# EAGLE board LIC_rack_ZR-0A (EAGLE 7.2.0)
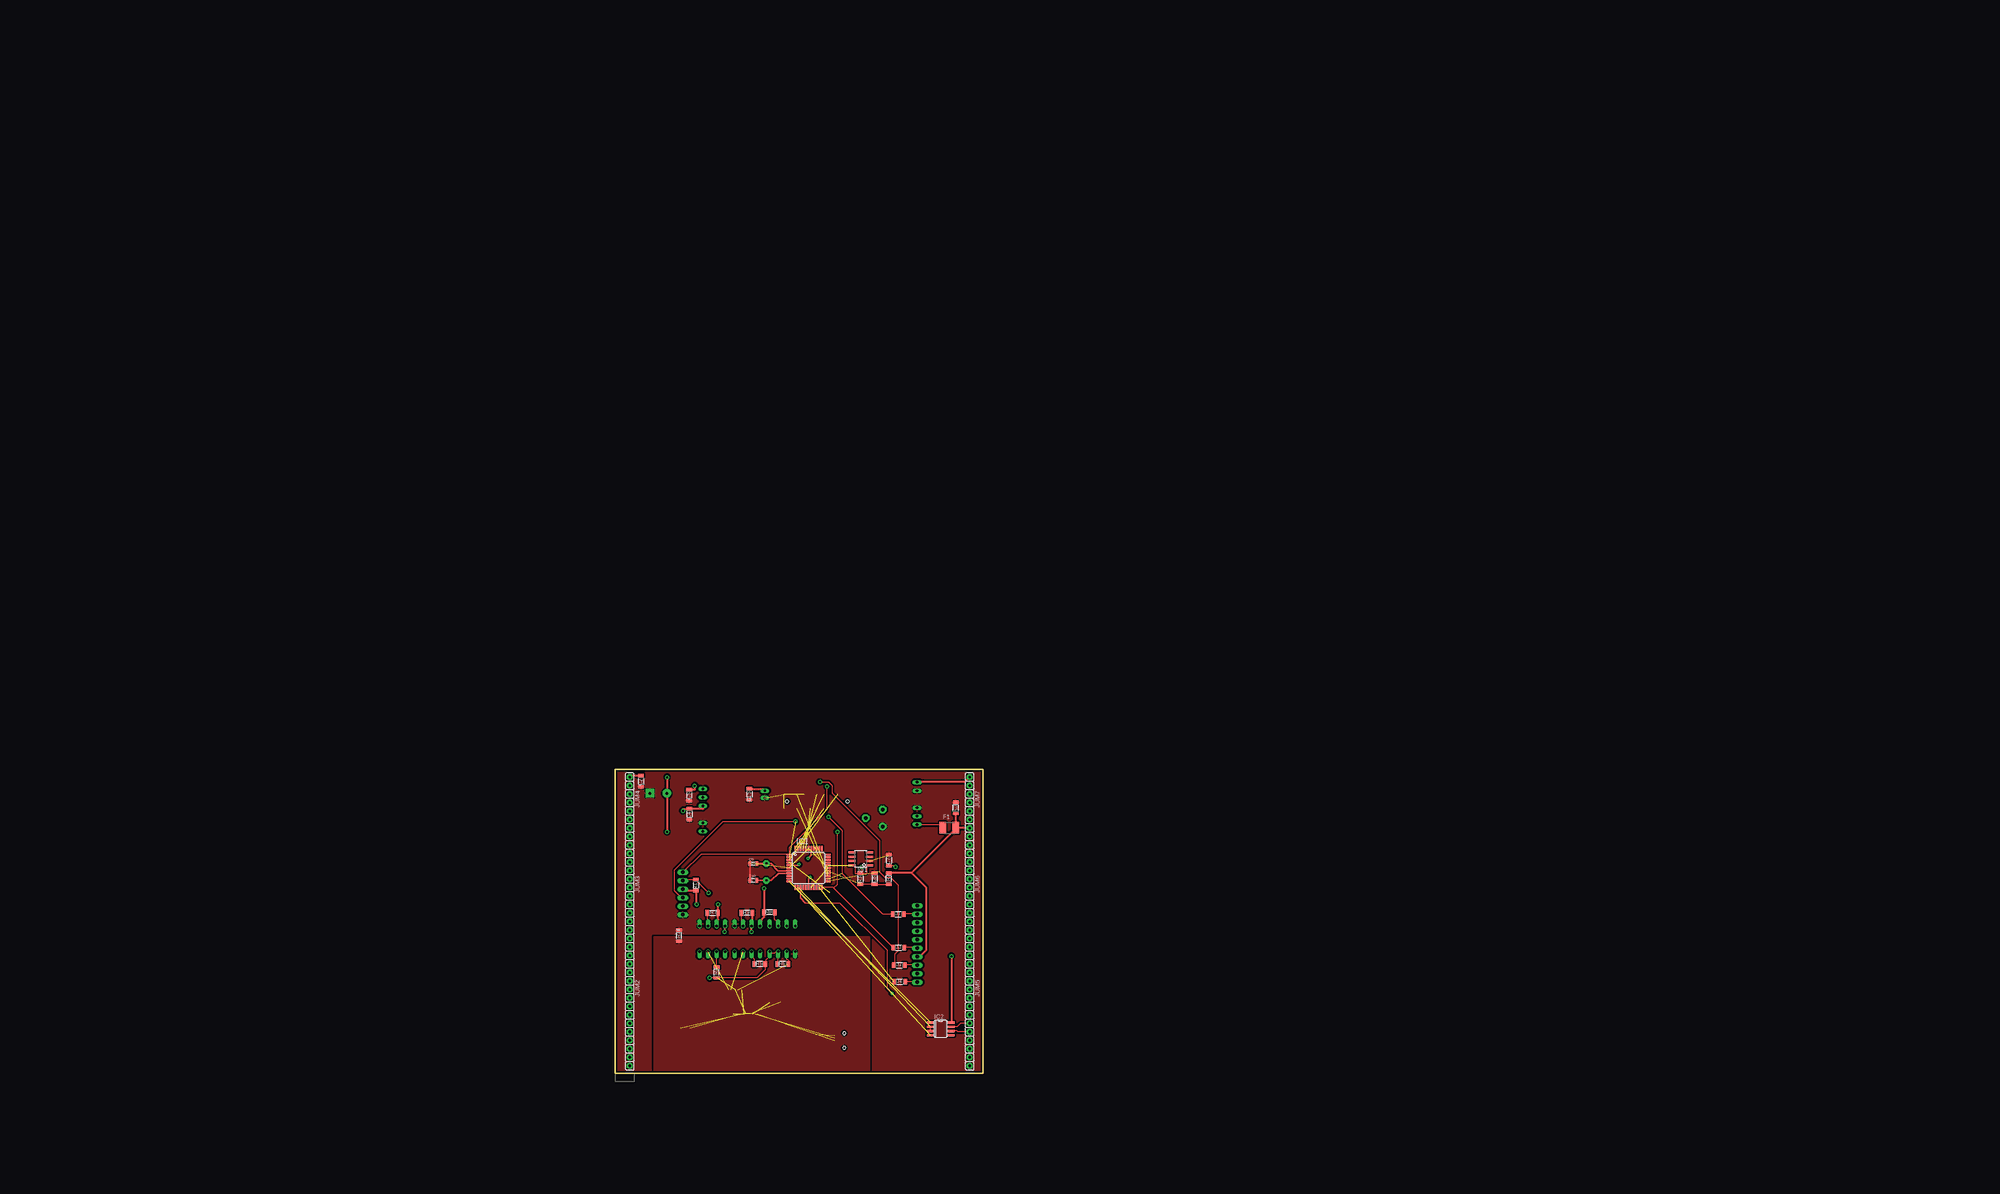
[diagram p0: board, top side]
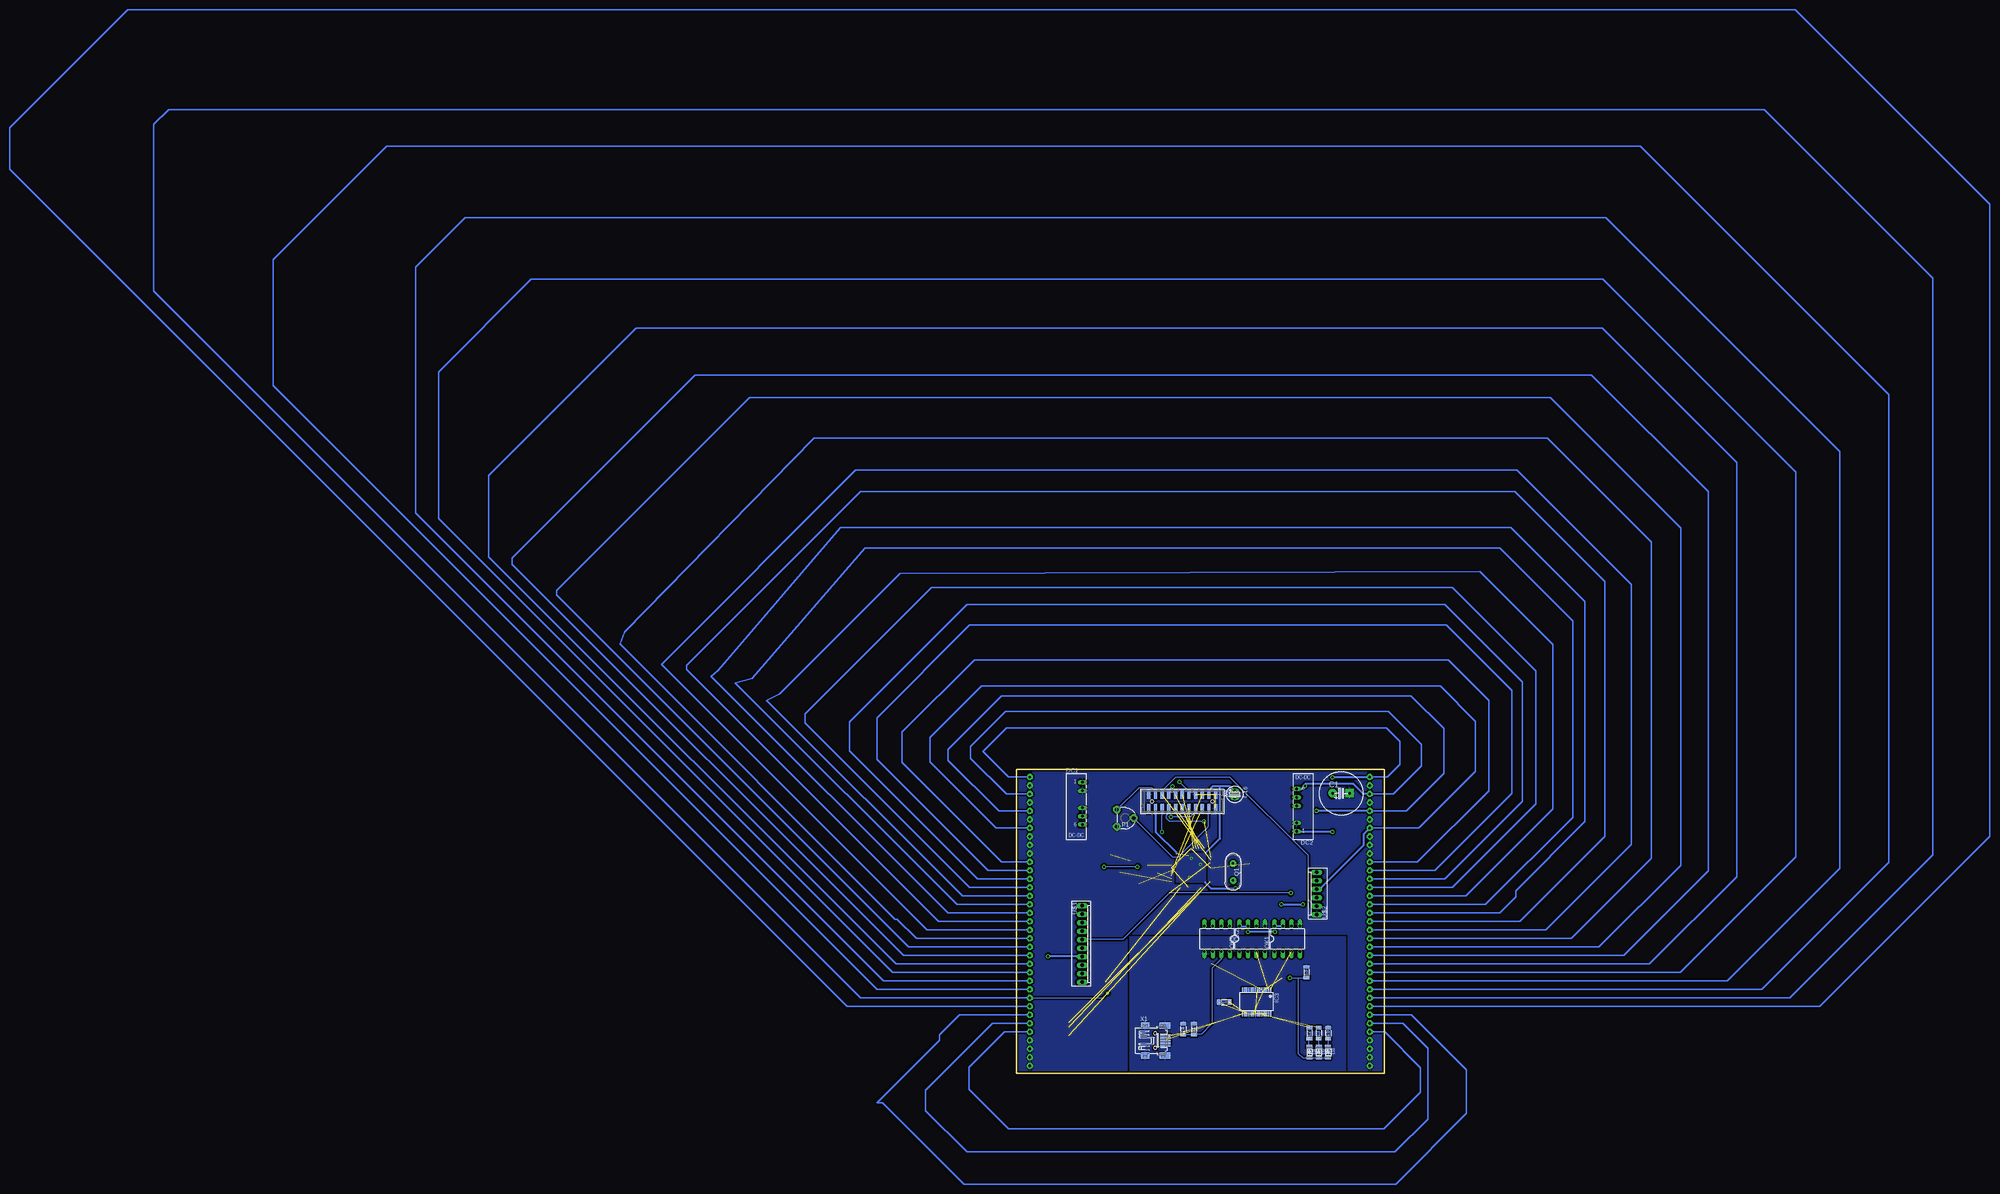
[diagram p1: board, bottom side, seen from below]

Size 110 x 90.8 mm. Coordinates in mm from the lower left corner, seen from the top.
Outline: 0,0 110,0 110,90.8 0,90.8 0,0
Copper layers (1*16): Top 0.04mm / dielectric 1.5mm / Bottom 0.04mm
Design rules "mucha_navrh *": minimum track width 0.2mm, minimum drill 0.6mm, track to track 0.5mm, track to pad 0.5mm, pad to pad 0.3mm, via to via 0.3mm, smd to smd 0mil, copper to edge 0.5mm, drill to drill 0.5mm, minimum pad ring 0.3mm, minimum via ring 0.3mm, stop-mask expansion 0.1mm, vias tented up to drill 0.8mm, thermal gap 0.3mm
Net classes: 0 default: width 0.305 mm, drill 0.3 mm, clearance 0.2 mm; 1 PC: width 0.305 mm, drill 0.3 mm, clearance 0.2 mm to class 0; 2 Supply: width 0.61 mm, drill 0.3 mm, clearance 0.4 mm to class 0; 3 Ground: width 0.305 mm, drill 0.3 mm, clearance 0.2 mm to class 0

## Footprints (pad centres in the part's own frame; a part is rotated, then mirrored left to right if it is on the bottom)
C_EL_5+ = drill 0.813 pad 2.54: C+ -2.54,0 | drill 0.813 pad 2.54 square: C- 2.54,0
1206 = smd 1.143 x 1.702: 1 -1.587,0; 2 1.587,0
0805 = smd 1.016 x 1.422: 1 -0.953,0; 2 0.953,0
C_EL_2 = drill 0.813 pad 1.27 long: C+ 0,0; C- 2.223,0
P1206 = smd 0.914 x 1.778: A -1.905,0; K 1.587,0
NMA = drill 0.813 long: 1 0,6.35; 2 0,3.81; 4 0,-1.27; 5 0,-3.81; 6 0,-6.35
R1812 = smd 1.9 x 3.4: 1 -1.95,0; 2 1.95,0
TQFP44 = smd 1.5 x 0.5: 1 -5.8,4; 2 -5.8,3.2; 3 -5.8,2.4; 4 -5.8,1.6; 5 -5.8,0.8; 6 -5.8,0; 7 -5.8,-0.8; 8 -5.8,-1.6; 9 -5.8,-2.4; 10 -5.8,-3.2; 11 -5.8,-4; 23 5.8,-4; 24 5.8,-3.2; 25 5.8,-2.4; 26 5.8,-1.6; 27 5.8,-0.8; 28 5.8,0; 29 5.8,0.8; 30 5.8,1.6; 31 5.8,2.4; 32 5.8,3.2; 33 5.8,4 | smd 0.5 x 1.5: 12 -4,-5.8; 13 -3.2,-5.8; 14 -2.4,-5.8; 15 -1.6,-5.8; 16 -0.8,-5.8; 17 0,-5.8; 18 0.8,-5.8; 19 1.6,-5.8; 20 2.4,-5.8; 21 3.2,-5.8; 22 4,-5.8; 34 4,5.8; 35 3.2,5.8; 36 2.4,5.8; 37 1.6,5.8; 38 0.8,5.8; 39 0,5.8; 40 -0.8,5.8; 41 -1.6,5.8; 42 -2.4,5.8; 43 -3.2,5.8; 44 -4,5.8
SO08 = smd 0.66 x 2.032: 1 -1.905,-3.073; 2 -0.635,-3.073; 3 0.635,-3.073; 4 1.905,-3.073; 5 1.905,3.073; 6 0.635,3.073; 7 -0.635,3.073; 8 -1.905,3.073
SSOP28 = smd 0.4 x 1.5: 1 -4.225,-3.625; 2 -3.575,-3.625; 3 -2.925,-3.625; 4 -2.275,-3.625; 5 -1.625,-3.625; 6 -0.975,-3.625; 7 -0.325,-3.625; 8 0.325,-3.625; 9 0.975,-3.625; 10 1.625,-3.625; 11 2.275,-3.625; 12 2.925,-3.625; 13 3.575,-3.625; 14 4.225,-3.625; 15 4.225,3.625; 16 3.575,3.625; 17 2.925,3.625; 18 2.275,3.625; 19 1.625,3.625; 20 0.975,3.625; 21 0.325,3.625; 22 -0.325,3.625; 23 -0.975,3.625; 24 -1.625,3.625; 25 -2.275,3.625; 26 -2.925,3.625; 27 -3.575,3.625; 28 -4.225,3.625
SO08' = smd 0.61 x 2.21: 1 -1.905,-2.616; 2 -0.635,-2.616; 3 0.635,-2.616; 4 1.905,-2.616; 5 1.905,2.616; 6 0.635,2.616; 7 -0.635,2.616; 8 -1.905,2.616
S1G15_JU = drill 0.813 pad 1.778 octagon: 1 -17.78,0; 2 -15.24,0; 3 -12.7,0; 4 -10.16,0; 5 -7.62,0; 6 -5.08,0; 7 -2.54,0; 8 0,0; 9 2.54,0; 10 5.08,0; 11 7.62,0; 12 10.16,0; 13 12.7,0; 14 15.24,0; 15 17.78,0
S1G10_JU = drill 0.813 pad 1.778 octagon: 1 -11.43,0; 2 -8.89,0; 3 -6.35,0; 4 -3.81,0; 5 -1.27,0; 6 1.27,0; 7 3.81,0; 8 6.35,0; 9 8.89,0; 10 11.43,0
DIL08 = drill 0.813 offset: 1 -3.81,-3.81; 2 -1.27,-3.81; 3 1.27,-3.81; 4 3.81,-3.81; 5 3.81,3.81; 6 1.27,3.81; 7 -1.27,3.81; 8 -3.81,3.81
PT6V = drill 1.016 pad 2.184 octagon: 1 -2.54,-2.54; 2 2.54,-2.54; 3 0,2.54
HC-49U = drill 0.61 pad 1.93 octagon: 1 -2.54,0; 2 2.54,0
PSH02-10P = drill 1.016 pad 1.422 long: 1 -11.43,0; 2 -8.89,0; 3 -6.35,0; 4 -3.81,0; 5 -1.27,0; 6 1.27,0; 7 3.81,0; 8 6.35,0; 9 8.89,0; 10 11.43,0
PSH02-06P = drill 1.016 pad 1.422 long: 1 -6.35,0; 2 -3.81,0; 3 -1.27,0; 4 1.27,0; 5 3.81,0; 6 6.35,0
32005-201 = smd 3.1 x 0.5: 1 3,1.6; 2 3,0.8; 3 3,0; 4 3,-0.8; 5 3,-1.6 | smd 2.5 x 2: M1 -3,-4.45; M2 -3,4.45 | smd 3.3 x 2: M3 2.9,4.45; M4 2.9,-4.45 | hole 0.9: 0,2.2; 0,-2.2
87832-22 = smd 1 x 2.75: 1 -10,-2.15; 2 -10,2.15; 3 -8,-2.15; 4 -8,2.15; 5 -6,-2.15; 6 -6,2.15; 7 -4,-2.15; 8 -4,2.15; 9 -2,-2.15; 10 -2,2.15; 11 0,-2.15; 12 0,2.15; 13 2,-2.15; 14 2,2.15; 15 4,-2.15; 16 4,2.15; 17 6,-2.15; 18 6,2.15; 19 8,-2.15; 20 8,2.15; 21 10,-2.15; 22 10,2.15 | hole 1: -9,0; 9,0

## Placement (x,y rotation side)
C1  1000M/35V  [C_EL_5+]  12.9,83.7 0 bottom
C2  100n  [1206]  7.7,87.3 270 top
C3  100n  [1206]  101.8,79.4 90 top
C4  100n  [1206]  22.2,77.5 270 top
C5  100n  [1206]  22.1,83.1 270 top
C7  100nF  [1206]  81.8,63.7 270 top
C8  10uF/16V  [1206]  77.5,58.2 270 top
C9  22pF  [0805]  41.3,62.7 0 top
C10  22pF  [0805]  41.3,57.7 0 top
C11  10n  [1206]  56.9,13.2 270 bottom
C12  100n  [1206]  47.9,21.3 0 bottom
C13  100n  [1206]  23.3,30.2 270 bottom
C14  10u/16V  [1206]  60.1,13.2 270 bottom
C15  100nF  [1206]  40.1,83.4 270 top
C16  100M/10V  [C_EL_2]  44.7,84.5 270 bottom
D1  [P1206]  22.4,6.5 90 bottom
D2  [P1206]  19.6,6.5 90 bottom
D3  [P1206]  16.8,6.5 90 bottom
DC1  TMH2405S  [NMA]  90.2,80.7 0 bottom
DC2  TMH2412D  [NMA]  26.2,78.7 180 bottom
F1  PPTC1812SMD050  [R1812]  99.9,73.4 0 top
IC1  ATMEGA644A  [TQFP44]  57.8,61.4 0 top
IC2  MAX481CSA  [SO08]  97.3,13.3 270 top
IC3  FT232RL  [SSOP28]  38.2,21.4 180 bottom
IO1  TL431SO08  [SO08']  73.4,64.1 90 top
J1  J_1206  [1206]  84.6,47.6 0 top
J2  J_1206  [1206]  84.9,32.4 0 top
J3  J_1206  [1206]  84.7,37.6 0 top
J4  J_1206  [1206]  85,27.4 0 top
JUM2  S1G15_JUMP  [S1G15_JU]  4.34,20 270 top
JUM3  S1G10_JUMP  [S1G10_JU]  4.34,51.75 270 top
JUM4  S1G10_JUMP  [S1G10_JU]  4.34,77.15 270 top
JUM5  S1G15_JUMP  [S1G15_JU]  105.97,20 270 top
JUM6  S1G10_JUMP  [S1G10_JU]  105.97,51.75 270 top
JUM7  S1G10_JUMP  [S1G10_JU]  105.97,77.15 270 top
OK1  6N137  [DIL08]  29,40.2 0 bottom
OK2  6N137  [DIL08]  50,40.2 180 bottom
OK5  6N137  [DIL08]  39.5,40.2 0 bottom
P1  PT6VK010  [PT6V]  77.4,76.3 270 bottom
Q1  14.7456MHz  [HC-49U]  45.2,60.2 270 bottom
R1  10k  [1206]  24.1,56.3 270 top
R2  10R  [1206]  81.8,58.2 90 top
R3  1k  [1206]  73.3,58.2 270 top
R4  330R  [1206]  30.3,30.2 90 top
R5  330R  [1206]  43.2,32.7 180 top
R6  1k  [1206]  50.1,32.7 180 top
R7  1k  [1206]  29.1,48 0 top
R8  330R  [1206]  46.1,48.1 180 top
R9  10k  [1206]  39.4,48 180 top
R12  580R  [1206]  22.4,12 270 bottom
R13  580R  [1206]  19.6,12 270 bottom
R14  10M  [1206]  19.1,41.2 90 top
R15  580R  [1206]  16.8,12 270 bottom
U$1  AVR_PROG_JTAG  [PSH02-10P]  90.3,38.7 270 bottom
U$2  AVR_PROG_SPI  [PSH02-06P]  20.2,53.8 90 bottom
X1  MINI-USB-SCHIELD-32005-201  [32005-201]  68.5,9.8 0 bottom
X2  87832-22  [87832-22]  60.4,81.3 180 bottom

## Library data of the parts
C1 C16 = #PaJa_C-el_2
C2-C5 C7-C15 D1-D3 J1-J4 P1 Q1 R1-R9 R12-R15 = #PaJa_31
DC1 DC2 = dc-dc-converter; MF: C & D TECHNOLOGIES, INC; MPN: NMA0515SC; OC_FARNELL: 1021434; OC_NEWARK: 61K3064
F1 = #_Fuses_polyswitch; MPN: 1812L050PR; OC_FARNELL: 1597001; PACKAGE: 1812; SUPPLIER: LITTELFUSE
IC1 = atmel; MPN: ATMEGA644PV-10AU; OC_FARNELL: 1455123; OC_NEWARK: 58M3748
IC2 = maxim; MF: MAXIM; MPN: MAX481CSA; OC_FARNELL: unknown; OC_NEWARK: 90C3817
IC3 = ftdichip; MPN: FT232RL; OC_FARNELL: 1146032; OC_NEWARK: 91K9918
IO1 = references; MPN: TL431CDT; OC_FARNELL: 1750206; PACKAGE: SO-08; SUPPLIER: STM
JUM2-JUM7 U$1 U$2 = #PaJa_konektory
OK1 OK2 OK5 = optocoupler; MPN: 6N137; OC_FARNELL: 1328376; OC_NEWARK: 52M1895
X1 = con-cypressindustries; OC_FARNELL: unknown; OC_NEWARK: unknown
X2 = con-molex; OC_FARNELL: unknown; OC_NEWARK: unknown

## Nets
0V: IC2.5
+5V [Supply]: C3.1 C15.1 C16.C+ F1.2 IC1.5 IC1.17 IC1.38 IC2.8 JUM4.7 JUM7.7 OK1.7 OK1.8 OK5.7 OK5.8 R1.2 R2.2 R7.2 R8.2 R9.1 U$1.7 U$2.4 X2.3 X2.20
+12V [Supply]: C5.1 DC2.6 JUM4.3 JUM7.3
+24V [Supply]: C1.C+ C2.1 DC1.1 DC2.1 JUM4.1 JUM7.1
-12V [Supply]: C4.1 DC2.4 JUM4.5 JUM7.5
DISPLAY_!RD: IC1.25 X2.6
DISPLAY_!RESET: IC1.23 J2.1 X2.9
DISPLAY_!WR: IC1.26 X2.5
DISPLAY_C/D: IC1.24 J1.1 X2.8
DISPLAY_FS: IC1.22 J3.1 X2.18
DISPLAY_PB0: IC1.40 X2.10
DISPLAY_PB1: IC1.41 X2.11
DISPLAY_PB2: IC1.42 X2.12
DISPLAY_PB3: IC1.43 X2.13
DISPLAY_PB4: IC1.44 X2.14
DISPLAY_V0: P1.3 X2.4
DISPLAY_VEE: P1.1 X2.19
EXT_RS485+: JUM2.9 JUM5.9
EXT_RS485-: JUM2.8 JUM5.8
GND: C1.C- C2.2 C3.2 C4.2 C5.2 C7.1 C8.1 C9.1 C10.1 C15.2 C16.C- DC1.2 DC1.4 DC2.2 IC1.6 IC1.18 IC1.28 IC1.39 IO1.2 JUM2.12 JUM2.13 JUM2.14 JUM2.15 JUM4.2 JUM4.4 JUM4.6 JUM4.8 JUM4.9 JUM4.10 JUM5.12 JUM5.13 JUM5.14 JUM5.15 JUM7.2 JUM7.4 JUM7.6 JUM7.8 JUM7.9 JUM7.10 OK1.5 OK5.5 P1.2 R14.2 U$2.1 X2.1 X2.2 X2.7 X2.21
GND0: U$1.9
GND1: U$1.1
GNDINT: C11.1 C12.1 C13.1 C14.1 IC3.7 IC3.18 IC3.21 IC3.25 IC3.26 OK2.5 R14.1 R15.1 X1.5 X1.M1 X1.M2 X1.M3 X1.M4
JTAG_TCK: J4.2 U$1.10
JTAG_TDI: J1.2 U$1.2
JTAG_TDO: J2.2 U$1.8
JTAG_TMS: J3.2 U$1.6
MODUL_RST: IC1.14 JUM2.7 JUM5.7
N$1: C9.2 IC1.7 Q1.1
N$2: C10.2 IC1.8 Q1.2
N$3: IC3.2 OK5.3
N$4: C8.2 IC1.27 R2.1 R3.2
N$5: OK1.2 R4.2
N$6: IC3.1 OK1.3
N$7: C7.2 IC1.29 IO1.1 IO1.8 R3.1
N$8: IC3.5 OK2.6 R6.1
N$9: OK2.2 R8.1
N$10: IC3.23 R12.1
N$11: IC3.22 R13.1
N$12: OK5.2 R5.2
N$16: D1.K R12.2
N$17: D2.K R13.2
N$19: DC1.6 F1.1
N$21: D3.K R15.2
N$22: C12.2 IC3.17
N.C.: X1.4
N.C.0: X2.22
PC0: IC1.19
PC1: IC1.20
PC2: IC1.21 J4.1
RESET: IC1.4 R1.1 U$1.5 U$2.5
RESET_AVR: OK5.6 R9.2
RS485+: IC2.6 JUM2.11 JUM5.11
RS485-: IC2.7 JUM2.10 JUM5.10
RS485_EN: IC1.13 IC2.2 IC2.3
RS485_RXD: IC1.11 IC2.1
RS485_TXD: IC1.12 IC2.4
RX_AVR: OK1.6 R7.1
SPI_MISO(PB6): IC1.2 U$2.3 X2.16
SPI_MOSI(PB5): IC1.1 U$2.6 X2.15
SPI_SCK(PB7): IC1.3 U$2.2 X2.17
SYNC01: JUM3.1 JUM6.1
SYNC02: JUM3.2 JUM6.2
SYNC03: JUM3.3 JUM6.3
SYNC04: JUM3.4 JUM6.4
SYNC05: JUM3.5 JUM6.5
SYNC06: JUM3.6 JUM6.6
SYNC07: JUM3.7 JUM6.7
SYNC08: JUM3.8 JUM6.8
SYNC09: JUM3.9 JUM6.9
SYNC10: JUM3.10 JUM6.10
SYNC11: JUM2.1 JUM5.1
SYNC12: JUM2.2 JUM5.2
SYNC13: JUM2.3 JUM5.3
SYNC14: JUM2.4 JUM5.4
SYNC15: JUM2.5 JUM5.5
SYNC16: JUM2.6 JUM5.6
TX_AVR: OK2.3
USB_DATA+: IC3.15 X1.3
USB_DATA-: IC3.16 X1.2
USB_RXD: IC1.9
USB_TXD: IC1.10
V-SUPPLY: U$1.4
VCCINT: C11.2 C13.2 C14.2 D1.A D2.A D3.A IC3.4 IC3.20 OK2.7 OK2.8 R4.1 R5.1 R6.2 X1.1

## Tracks (layer width: path | path; a pad name or v marks a point on that pad's centre or on a via)
+5V  (via drill 0.3, 0.6)  (1 unrouted)
  Top 0.406: IC1.38 58.6,65.2 v57.6,64.2 | IC1.5 54.8,62.2 v55,62.4 | IC1.17 57.8,58.1 v58.3,58.6
  Top 0.61: R9.1 41,45.75 40.75,45.5 40.75,44.25 OK5.7 40.75,43.75 v40.75,42.25 | OK5.8 43.25,44.25 43.25,45.5 44.5,46.75 44.5,48 R8.2 44.5,48.25 v44.5,55.25 | U$2.4 20.25,55 20.25,54.75 24,54.75 R1.2 24.25,54.5 v24.25,50.5 | OK1.7 30.25,44.25 30.25,45.5 30.75,46 30.75,48 R7.2 30.75,48.25 v30.75,50.5 | v32.75,42.25 32.75,44 OK1.8 | v100.5,35 100.5,15.25 IC2.8 | 88.53,59.96 81.89,59.96 R2.2 | 88.53,59.96 101.81,73.24 F1.2 | C3.1 101.81,77.66 101.81,73.64 F1.2 | 88.53,59.96 92.95,55.53 92.95,36.82 91.14,35.01 90.34,35.01 U$1.7 | C15.1 40.24,84.91 44.26,84.91 44.67,84.5 C16.C+ | F1.2 102.01,73.44 105.83,73.44 JUM7.7
  Bottom 0.406: JUM7.7 116.04,73.34 135.8,93.1 135.8,100.4 120.4,115.8 -16.7,115.8 -27.3,105.2 -27.3,90.3 -10.34,73.34 JUM4.7
  Bottom 0.61: OK5.7 41,44 43.25,44 OK5.8 | OK1.8 32.75,44 30.5,44 OK1.7 | v30.75,50.5 v24.25,50.5 | v32.75,42.25 v40.75,42.25 | v100.5,35 90.5,35 U$1.7 | v44.5,55.25 51.75,55.25 53.5,57 53.5,57.2 | 49.09,85.71 46.08,85.71 44.87,84.5 C16.C+ | 49.09,85.71 51.31,85.71 52.31,84.7 52.31,83.5 X2.3 | X2.20 68.21,79.07 68.21,72.03 62.17,65.99 62.1,65.8 | 49.09,85.71 49.09,70.22 53.32,65.99 53.4,65.8 | U$2.4 20.12,55.13 19.32,55.13 6.24,68.21 6.24,71.43 4.43,73.24 JUM4.7
  pour Bottom: 53.4,65.8 62.1,65.8 62.1,57.2 53.4,57.2
+12V  (via drill 0.6)
  Top 0.61: v23.75,86 23.75,84.75 22.25,84.75 C5.1
  Bottom 0.406: JUM7.3 113,83.5 123.7,94.2 123.7,97.7 113.2,108.2 -1.2,108.2 -11.1,98.3 -11.1,91.9 -2.7,83.5 JUM4.3
  Bottom 0.61: DC2.6 26,85 24.75,85 v23.75,86 23.75,86.25 23.5,86.5 9.25,86.5 6.25,83.5 JUM4.3
+24V  (via drill 0.6)
  Top 0.61: v15.5,72.25 15.5,83.5 C1.C+ 15.5,84 v15.5,88.5 | C2.1 7.5,89 4.25,89 4.25,88.75 JUM4.1 | DC1.1 90.34,87.12 104.42,87.12 105.83,88.53 JUM7.1
  Bottom 0.406: JUM4.1 -0.88,88.58 -4.7,92.4 -4.7,99.2 -0.7,103.2 113,103.2 120,96.2 112.38,88.58 JUM7.1
  Bottom 0.61: v15.5,72.25 26,72.25 DC2.1 | v15.5,88.5 4.5,88.5 JUM4.1
-12V  (via drill 0.6)
  Top 0.61: DC2.4 26.25,79.75 26.25,79 22.25,79 C4.1 22,79 20.25,79 v20.25,78.5
  Bottom 0.406: JUM4.5 -6.62,78.42 -17.8,89.6 -17.8,103.1 -8,112.9 114.4,112.9 130.4,96.9 130.4,93.6 115.2,78.4 106,78.4 JUM7.5
  Bottom 0.61: v20.25,78.5 4.5,78.5 JUM4.5
DISPLAY_!RD  (1 unrouted)
DISPLAY_!RESET  (via drill 0.6)  (1 unrouted)
  Top 0.305: v61.16,87.12 63.78,87.12 64.79,86.11 64.79,83.9 79.07,69.61 79.07,60.16 80.68,58.55 82.29,58.55 84.5,56.34 84.5,36.62 83.5,35.61 83.5,32.59 J2.1
  Bottom 0.305: v61.16,87.12 58.55,84.5 58.55,83.5 X2.9
DISPLAY_!WR  (1 unrouted)
DISPLAY_C/D  (via drill 0.6)  (1 unrouted)
  Top 0.305: v63.78,76.66 67.8,72.63 67.8,59.76 79.88,47.68 82.89,47.68 J1.1
  Bottom 0.305: v63.78,76.66 57.95,76.66 56.54,78.07 56.54,79.07 X2.8
DISPLAY_FS  (via drill 0.6)
  Top 0.305: 65.29,55.43 83.1,37.62 J3.1 | 65.29,55.43 65.19,55.53 61.97,55.53 IC1.22 | v66.4,72.23 66.4,56.54 65.29,55.43
  Bottom 0.305: v66.4,72.23 66.4,79.07 X2.18
DISPLAY_PB0  (1 unrouted)
DISPLAY_PB1  (1 unrouted)
DISPLAY_PB2  (1 unrouted)
DISPLAY_PB3  (1 unrouted)
DISPLAY_PB4  (1 unrouted)
DISPLAY_V0
  Bottom 0.305: X2.4 52.51,79.07 52.51,73.84 61.57,64.79 63.38,64.79 74.85,76.25 P1.3
DISPLAY_VEE
  Bottom 0.305: X2.19 68.41,83.5 68.41,84.3 69.61,85.51 73.24,85.51 79.88,78.87 P1.1
EXT_RS485+
  Bottom 0.406: JUM5.9 127.04,17.46 133,11.5 133,9.9 151.7,-8.8 150,-8.8 125.7,-33.1 -3.4,-33.1 -24.5,-12 -24.5,1.1 -8.14,17.46 JUM2.9
EXT_RS485-
  Bottom 0.406: JUM5.8 160.6,20 410.9,270.3 410.9,282.8 375.7,318 -122.9,318 -181,259.9 -181,70.8 -130.2,20 JUM2.8
GND  (8 unrouted)
  Top 0.406: C9.1 C10.1
  pour Top (rank 5): 0,0 110,0 110,90.8 0,90.8
  pour Bottom (rank 5): 0,0 110,0 110,90.8 0,90.8
GNDINT  (5 unrouted)
  pour Top (rank 4): 11.6,40.8 76,40.8 76,0.1 76,0 11.6,0
  pour Bottom (rank 4): 11.6,40.8 76,40.8 76,0.1 76,0 11.6,0
JTAG_TCK
  Top 0.305: J4.2 86.72,27.36 90.14,27.36 U$1.10
JTAG_TDI
  Top 0.305: J1.2 86.31,47.68 90.14,47.68 U$1.2
JTAG_TDO
  Top 0.305: J2.2 86.52,32.39 90.14,32.39 U$1.8
JTAG_TMS
  Top 0.305: J3.2 86.31,37.62 90.14,37.62 U$1.6
MODUL_RST  (via drill 0.3)
  Top 0.305: 56.8,51 67.1,51 81.2,36.9 81.2,25.4 v82.7,23.9
  Top 0.406: IC1.14 55.4,52.4 56.8,51
  Bottom 0.305: JUM5.7 84.06,22.54 v82.7,23.9
  Bottom 0.406: JUM5.7 156.54,22.54 367.8,233.8 367.8,283.7 363.4,288.1 -113.6,288.1 -164,237.7 -164,65.3 -121.24,22.54 JUM2.7
N$1
  Top 0.406: IC1.7 48.7,60.6 46.56,62.74 Q1.1 42.29,62.74 C9.2
N$2
  Top 0.406: IC1.8 48.8,59.8 46.66,57.66 Q1.2 45.16,57.7 C10.2
N$3  (1 unrouted)
N$4  (1 unrouted)
  Top 0.305: R3.2 73.44,56.54 77.46,56.54 C8.2 77.66,56.54 81.69,56.54 R2.1
N$5
  Top 0.305: OK1.2 30.25,36.25 30.25,32.25 30,32 30,31.75 30.25,31.75 R4.2
N$6  (1 unrouted)
N$7  (via drill 0.6)  (1 unrouted)
  Top 0.305: R3.1 73.25,59.75 71.75,59.75 71.75,62 71.5,62.25 71,62.25 IO1.8 | v83.75,61.75 83.75,62 82,62 C7.2 | 73.75,59.75 v73.75,61.75 | 73.75,59.75 73.5,59.75 R3.1 | 73.75,59.75 75,59.75 75.25,60 75.25,62.25 76,62.25 IO1.1 | 73.75,59.75 R3.1
  Bottom 0.305: v73.75,61.75 v83.75,61.75
N$8  (1 unrouted)
  Top 0.305: R6.1 51.75,32.75 51.75,33.75 51.25,34.25 51.25,36.25 OK2.6
N$9
  Top 0.305: R8.1 47.68,48.09 47.68,46.08 48.69,45.07 48.69,44.06 OK2.2
N$10  (1 unrouted)
N$11  (1 unrouted)
N$12
  Top 0.305: R5.2 41.5,32.75 41.5,34.25 40.75,35 40.75,36.25 OK5.2
N$16
  Bottom 0.305: R12.2 22.5,10.25 22.5,8.25 D1.K
N$17
  Bottom 0.305: R13.2 19.5,10.25 19.5,8.25 D2.K
N$19
  Top 0.305: DC1.6 90.34,74.24 96.98,74.24 97.78,73.44 F1.1
N$21
  Bottom 0.305: R15.2 16.75,10.25 16.75,8.25 D3.K
N$22  (1 unrouted)
PC2  (1 unrouted)
RESET  (via drill 0.6)  (1 unrouted)
  Top 0.305: U$2.5 20.32,57.74 20.52,57.95 23.94,57.95 R1.1 24.14,57.74 v27.97,53.92
  Bottom 0.305: v27.97,53.92 64.18,53.92 78.07,40.04 90.14,40.04 U$1.5
RESET_AVR
  Top 0.305: R9.2 37.83,47.89 37.83,44.47 38.23,44.06 OK5.6
RS485+
  Top 0.305: IC2.6 100.4,12.68 102.21,12.68 102.41,12.47 105.83,12.47 JUM5.11
  Bottom 0.406: JUM5.11 113.6,12.38 124.2,1.78 124.2,-4.7 112.3,-16.6 0.1,-16.6 -10.8,-5.7 -10.8,1.7 -0.12,12.38 JUM2.11
RS485-
  Top 0.305: IC2.7 100.4,13.88 102.21,13.88 103.22,14.89 105.83,14.89 JUM5.10
  Bottom 0.406: JUM2.10 -5.58,14.92 -13,7.5 -13,-13.7 -3.2,-23.5 124.8,-23.5 137.1,-11.2 137.1,-5 117.18,14.92 JUM5.10
RS485_EN  (1 unrouted)
  Top 0.305: IC2.2 94.25,13.75 94.25,12.75 IC2.3
RS485_RXD  (1 unrouted)
RS485_TXD  (1 unrouted)
RX_AVR
  Top 0.305: R7.1 27.56,47.89 27.56,44.06 OK1.6
SPI_MISO(PB6)  (via drill 0.6)  (1 unrouted)
  Top 0.305: v53.92,75.25 32.19,75.25 17.71,60.76 17.71,54.52 19.52,52.71 20.12,52.71 U$2.3
  Bottom 0.305: v53.92,75.25 64.18,75.25 65.19,76.25 65.19,77.06 64.58,77.66 64.58,79.07 X2.16
SPI_MOSI(PB5)  (via drill 0.6)
  Top 0.305: U$2.6 20.32,60.16 25.75,65.59 51.91,65.59 IC1.1 52.11,65.59 52.11,67.6 63.38,78.87 v63.38,85.71
  Bottom 0.305: v63.38,85.71 64.38,84.7 64.38,83.5 X2.15
SPI_SCK(PB7)  (1 unrouted)
  Bottom 0.305: X2.17 66.4,83.5 66.4,84.5 62.37,88.53 46.08,88.53 22.74,65.19 22.74,51.91 20.93,50.1 20.32,50.1 U$2.2
SYNC01
  Bottom 0.406: JUM3.1 -9.88,63.18 -31.2,84.5 -31.2,111.5 -19.1,123.6 122.5,123.6 144.1,102 144.1,92.9 114.38,63.18 JUM6.1
SYNC02
  Bottom 0.406: JUM6.2 118.44,60.64 151.7,93.9 151.7,106.3 124,134 -18.6,134 -38.2,114.4 -38.2,83.7 -15.14,60.64 JUM3.2
SYNC03
  Bottom 0.406: JUM6.3 121.6,58.1 159.9,96.4 159.9,105.1 124.8,140.2 -18.1,140.2 -41.3,117 -41.3,81.3 -18.1,58.1 JUM3.3
SYNC04
  Bottom 0.406: JUM6.4 124.06,55.56 173.2,104.7 173.2,107.4 135.4,145.2 -20.4,145.2 -45.3,120.3 -45.3,80.5 -20.36,55.56 JUM3.4
SYNC05
  Bottom 0.406: JUM6.5 126.12,53.02 184.6,111.5 180.7,113.5 144.7,149.5 -28.6,150 -50.4,128.2 -50.4,79 -24.42,53.02 JUM3.5
SYNC06
  Bottom 0.406: JUM6.6 127.78,50.48 194,116.7 189,118.1 155.2,157 -34.5,157 -56.3,135.2 -56.3,76.5 -30.28,50.48 JUM3.6
SYNC07
  Bottom 0.406: JUM6.7 130.44,47.94 201.2,118.7 199.2,120.4 162.5,163.2 -37.9,163.2 -60,141.1 -60,75.3 -39.3,54.6 -39.3,52.7 -34.54,47.94 JUM3.7
SYNC08
  Bottom 0.406: JUM6.8 133.3,45.4 208.6,120.7 208.6,122 156.6,174 -39.1,174 -66,147.1 -66,70.9 -40.5,45.4 JUM3.8
SYNC09
  Bottom 0.406: JUM6.9 136.66,42.86 216.1,122.3 158,180.4 -39.6,180.4 -73.8,146.2 -73.8,68.4 -48.26,42.86 JUM3.9
SYNC10
  Bottom 0.406: JUM6.10 139.82,40.32 145.6,46.1 | 145.6,46.1 145.7,46.2 | JUM3.10 -55.92,40.32 -79.9,64.3 -79.9,158.9 -48.8,190 170.5,190 227.1,132 228.4,128.3 146.2,46.1 145.6,46.1
SYNC11
  Bottom 0.406: JUM5.1 142.18,37.78 247.4,143 247.4,144.4 189.8,202 -49.6,202 -88.6,163 -88.6,62.2 -64.18,37.78 JUM2.1
SYNC12
  Bottom 0.406: JUM5.2 143.74,35.24 260.7,152.2 260.7,154.1 206,208.8 -61.9,208.8 -96.8,173.9 -96.8,60.5 -71.54,35.24 JUM2.2
SYNC13
  Bottom 0.406: JUM5.3 146,32.7 267.7,154.4 267.7,178.8 223.7,222.8 -65.2,222.8 -105.4,182.6 -105.4,58.8 -79.3,32.7 JUM2.3
SYNC14
  Bottom 0.406: JUM5.4 146.96,30.16 282.7,165.9 282.7,209.7 255,237.4 -65.3,237.4 -123,179.7 -123,64.7 -88.46,30.16 JUM2.4
SYNC15
  Bottom 0.406: JUM5.5 149.72,27.62 289.6,167.5 289.6,241 274.7,255.9 -66.2,255.9 -136.2,185.9 -136.2,61.3 -102.52,27.62 JUM2.5
SYNC16
  Bottom 0.406: JUM5.6 151.58,25.08 332.1,205.6 332.1,243.3 298.2,277.2 -76.6,277.2 -150.8,203 -150.8,63 -112.88,25.08 JUM2.6
USB_DATA+  (1 unrouted)
USB_DATA-  (1 unrouted)
VCCINT  (via drill 0.6)  (3 unrouted)
  Top 0.305: v28.25,28.5 30.25,28.5 R4.1 30.38,28.57 42.45,28.57 44.87,30.98 44.87,32.59 R5.1 45,32.75 45,33.75 46.25,35 46.25,36 | 46.25,36 47.75,36 48,36.25 48.5,36.25 OK2.7 48.75,36.25 48.75,35 48.5,34.75 48.5,32.75 R6.2 | 46.25,36 46.25,36.25 OK2.8 46.25,36
  Bottom 0.305: D3.A 17,4.5 19.5,4.5 D2.A 19.75,4.5 22.25,4.5 D1.A 22.53,4.63 24.34,4.63 25.75,6.04 25.75,28.5 | v28.25,28.5 25.75,28.5 | 25.75,28.5 23.5,28.5 C13.2 | C14.2 60,11.5 57,11.5 C11.2 56.74,11.67 54.73,11.67 51.51,14.89 51.51,31.39 48.69,34.2 48.69,36.22 OK2.7

## Text on the board
tTest: 8HU | 2HU | 4HU | 8HU | 2HU | 8HU | 8HU | 8HU | 8HU | 2HU | 4HU | 4HU
centerDrill: Vrstva Bottom - Velke soucastky !!!